# Altium PCB model_a.PcbDoc (part 2 of 2)
Units mm, origin at the board's own origin, x right, y up, seen from the top; angles counter-clockwise.
Board outline 65 x 56 mm, 6 copper layers (Top Layer, Ground 1, Supply, Layer 2, Ground 2, Bottom Layer), stack 1.597 mm thick; 97 components, 140 nets, 582 pads, 134 vias.
Unrouted connection lines stored in the file: 357.
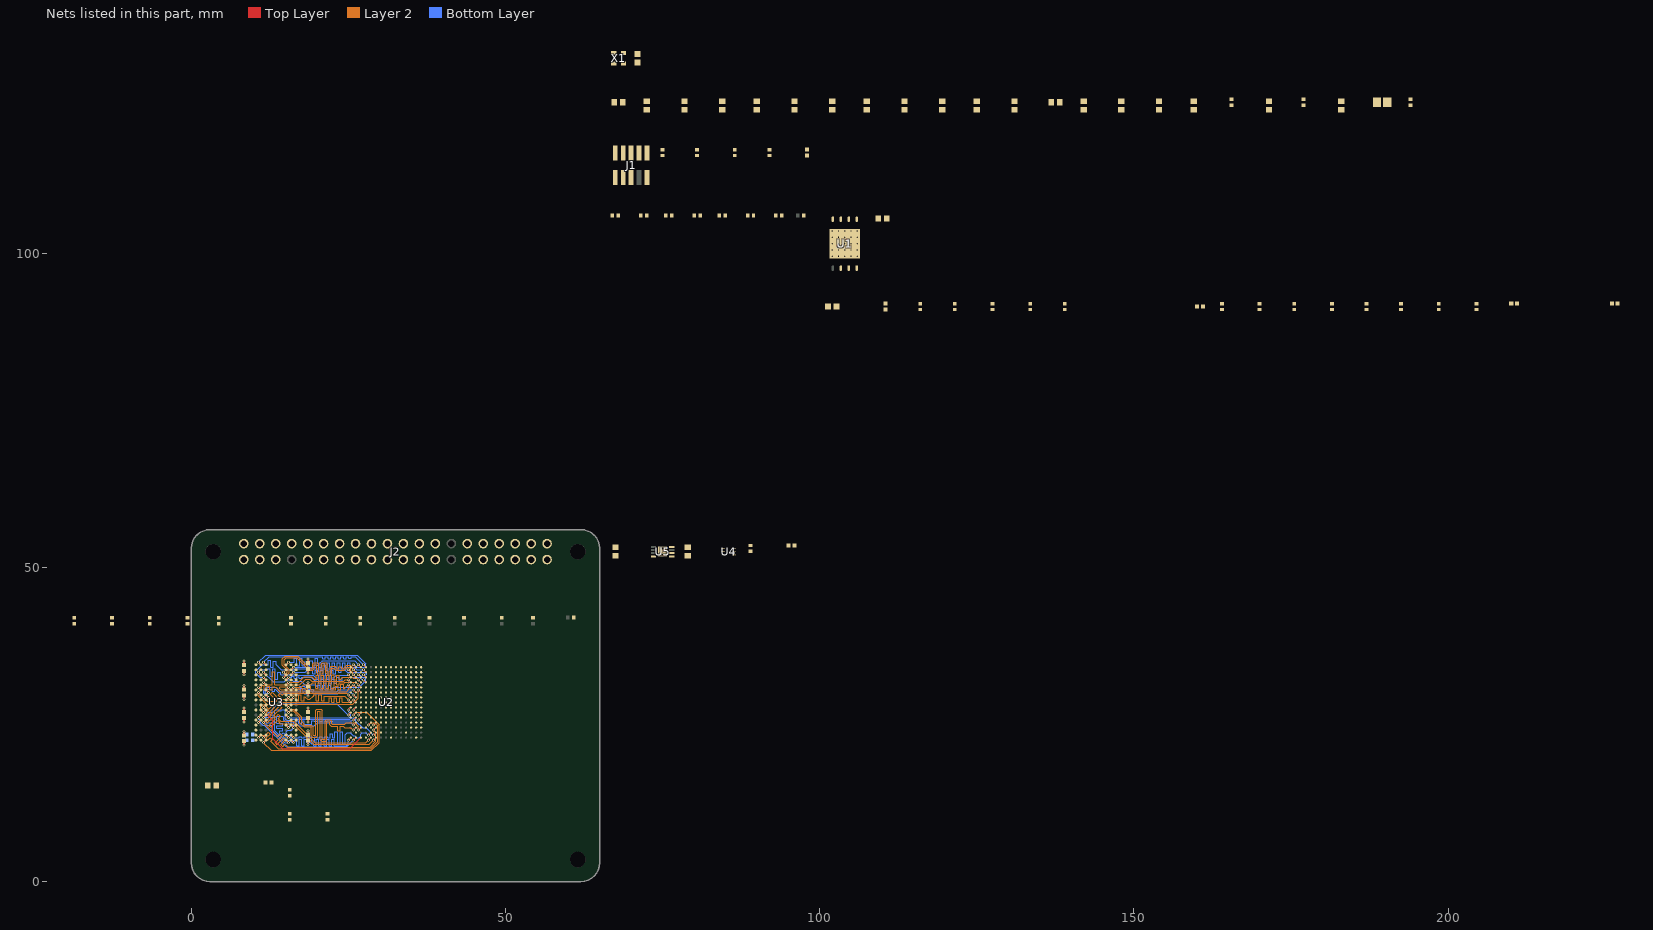
[diagram p3: the nets of this part, all layers, seen from the top]

## Via types
v1: diameter 0.46, hole 0.2, Top Layer to Bottom Layer, tented both sides, 107 vias
v2: diameter 0.5, hole 0.2, Top Layer to Bottom Layer, 25 vias
v3: diameter 0.6, hole 0.3, Top Layer to Bottom Layer, 2 vias

## Nets (pads, with @x,y where several pads share a name; then routed paths per layer and width w, separated by ;. In a path a pad name is that pad's centre, name@x,y a point inside that pad or via, vN(x,y) a via of type N, cw(c..) or ccw(c..) an arc to the next point about the centre after c; other vN are vias at no path point) (continued)
A6: R15.1 U2.P5 U3.R8 | length 27.1
  Top Layer w0.158: U3.R8@15.9,23.3 15.9,23.298 v1(16.3,22.897) v1(16.3,22.897) ; v1(28.2,23.3) U2.P5@28.6,23.7
  Bottom Layer w0.158: v1(16.3,22.897) 17.079,22.897 17.158,22.897 17.158,23.058 17.571,23.058 17.571,22.897 17.983,22.897 17.983,23.058 18.396,23.058 18.396,22.897 18.808,22.897 18.808,23.058 19.22,23.058 19.22,22.229 19.633,22.229 19.633,23.058 20.045,23.058 20.045,22.897 20.458,22.897 20.458,23.058 20.87,23.058 20.87,22.897 21.282,22.897 21.282,23.058 21.695,23.058 21.695,22.897 22.107,22.897 22.107,23.549 22.52,23.549 22.52,22.897 22.8,22.897 22.879,22.897 22.879,23.853 23.292,23.853 23.292,21.896 23.704,21.896 23.704,23.853 24.116,23.853 24.116,21.896 24.529,21.896 24.529,23.385 24.759,23.615 24.835,23.692 25.296,23.692 25.822,23.166 26.047,23.166 26.308,22.905 26.765,22.905 27,23.14 27,23.463 27.235,23.698 27.802,23.698 v1(28.2,23.3)
A7: R16.1 U2.M5 U3.R2 | length 28.5
  Top Layer w0.158: v1(10.7,22.9) U3.R2@11.1,23.3 ; v1(28.2,24.9) U2.M5@28.6,25.3
  Layer 2 w0.169: v1(10.7,22.9) 11.1,23.3 11.71,23.3 11.77,23.24 12.262,23.733 12.561,23.434 11.903,22.776 12.202,22.478 12.576,22.852 12.875,22.553 12.666,22.344 13,22.01 13.871,21.139 28.574,21.139 29.661,22.226 29.661,24.81 29.167,25.303 28.603,25.303 v1(28.2,24.9)
A8: R17.1 U2.P6 U3.T8 | length 27.1
  Top Layer w0.158: U3.T8@15.9,22.5 v1(16.3,22.1) ; v1(29,23.3) U2.P6@29.4,23.7
  Bottom Layer w0.158: v1(16.3,22.1) 16.246,22.154 16.009,22.154 15.664,22.499 14.851,22.499 13.333,24.017 13.333,27.207 13.426,27.3 13.917,27.3 13.917,27.161 14.33,27.161 14.33,27.3 14.789,27.3 14.907,27.3 15,27.207 15,25.856 15.2,25.656 15.744,25.656 15.94,25.853 19.403,25.853 19.405,25.855 25.267,25.855 25.511,26.098 25.965,26.098 26.202,25.861 26.202,25.535 27.27,24.467 27.833,24.467 v1(29,23.3)
A9: R18.1 U2.N4 U3.R3 | length 0.6
  Top Layer w0.158: v1(11.5,22.897) v1(11.5,22.897) 11.9,23.298 U3.R3@11.9,23.3
A10: R21.1 U2.J1 U3.L7 | length 12.3
  Top Layer w0.158: U3.L7@15.1,26.5 v1(15.5,26.1) ; v1(25,27.3) U2.J1@25.4,27.7
  Bottom Layer w0.158: v1(15.5,26.1) 19.301,26.1 19.302,26.102 25.165,26.102 25.398,26.335 25.398,26.665 25.054,27.009 25.054,27.246 v1(25,27.3)
A11: R23.1 U2.L2 U3.R7 | length 26.7
  Top Layer w0.158: U3.R7@15.1,23.3 15.1,23.298 v1(15.5,22.897) v1(15.5,22.897) ; v1(25.8,25.7) U2.L2@26.2,26.1
  Bottom Layer w0.158: v1(15.5,22.897) 15.167,22.897 15.055,22.897 14.929,22.77 14.637,23.062 14.933,23.358 14.641,23.649 14.346,23.354 14.199,23.5 14.12,23.579 14.12,23.992 14.531,23.992 14.531,24.404 13.58,24.404 13.58,24.817 14.531,24.817 14.531,25.229 13.58,25.229 13.58,25.641 13.6,25.641 13.6,26.022 13.6,26.304 14.607,26.304 14.7,26.211 14.7,25.7 15,25.4 15.079,25.4 15.079,25.409 15.492,25.409 15.492,25.145 15.904,25.145 15.904,25.468 16.316,25.468 16.316,25.145 16.729,25.145 16.729,25.605 17.141,25.605 17.141,25.134 17.554,25.134 17.554,25.605 17.966,25.605 17.966,25.002 19.203,25.002 19.203,25.605 19.616,25.605 19.616,25.532 20.028,25.532 20.028,25.607 20.44,25.607 20.44,25.545 20.853,25.545 20.853,25.607 21.265,25.607 21.265,25.545 21.678,25.545 21.678,25.607 22.09,25.607 22.09,25.545 22.502,25.545 22.502,25.607 22.8,25.607 25.556,25.607 25.591,25.642 25.742,25.642 v1(25.8,25.7)
A12: R25.1 U2.M2 U3.N7 | length 12
  Top Layer w0.158: U3.N7@15.1,24.9 v1(15.5,24.5) ; v1(25.8,24.9) U2.M2@26.2,25.3
  Bottom Layer w0.158: v1(15.5,24.5) 15.898,24.898 17.068,24.898 17.211,24.755 19.564,24.755 20.108,25.298 25.402,25.298 v1(25.8,24.9)
A13: R27.1 U2.K2 U3.T3 | length 28.5
  Top Layer w0.158: v1(11.5,22.1) U3.T3@11.9,22.5 ; v1(25.8,26.5) U2.K2@26.2,26.9
  Layer 2 w0.169: v1(11.5,22.1) 12.718,20.882 28.68,20.882 29.918,22.12 29.918,24.916 27.931,26.903 26.203,26.903 v1(25.8,26.5)
A14: R29.1 U2.K1 U3.T7 | length 27.1
  Top Layer w0.158: U3.T7@15.1,22.5 v1(15.5,22.1) ; v1(25,26.5) U2.K1@25.4,26.9
  Bottom Layer w0.158: v1(15.5,22.1) 14.9,22.1 12.9,24.1 12.9,24.817 12.9,24.896 11.936,24.896 11.936,25.309 13.086,25.309 13.086,25.721 11.898,25.721 11.898,26.134 13.086,26.134 13.086,26.546 12.249,26.546 12.249,26.958 12.9,26.958 12.9,27.4 13.8,28.3 23.2,28.3 v1(25,26.5)
A15: R32.1
AGND: C19.1 FB3.2 U2.G8 U2.H7
BA0: R24.1 U2.M6 U3.M2 | length 1.1
  Top Layer w0.158: v1(10.7,25.3) U3.M2@11.1,25.7 ; v1(29,24.9) U2.M6@29.4,25.3
BA1: R26.1 U2.R1 U3.N8 | length 26.7
  Top Layer w0.158: U3.N8@15.9,24.9 v1(16.3,24.5) ; v1(25,22.5) U2.R1@25.4,22.9
  Bottom Layer w0.158: v1(16.3,24.5) 15.901,24.101 15.335,24.101 15.102,23.868 15.102,23.538 15.34,23.3 15.66,23.3 15.898,23.062 15.898,22.736 16.135,22.499 16.459,22.499 16.6,22.499 16.759,22.34 16.759,21.649 17.171,21.649 17.171,22.65 17.584,22.65 17.584,21.649 17.996,21.649 17.996,22.65 18.408,22.65 18.408,22.198 18.821,22.198 18.821,22.2 18.9,22.2 19.072,22.028 19.072,21.934 19.484,21.934 19.484,21.649 19.897,21.649 19.897,22.65 20.309,22.65 20.309,21.649 20.722,21.649 20.722,22.65 21.134,22.65 21.134,21.649 21.546,21.649 21.546,22.65 21.959,22.65 21.959,21.649 22.371,21.649 22.371,22.65 22.784,22.65 22.784,21.649 23.119,21.649 24.64,21.649 25,22.01 v1(25,22.5)
BA2: R28.1 U2.N6 U3.M3 | length 28.5
  Top Layer w0.158: v1(11.5,25.3) U3.M3@11.9,25.7 ; v1(29,24.1) U2.N6@29.4,24.5
  Layer 2 w0.169: v1(11.5,25.3) 13.667,23.133 13.727,23.073 14.17,23.515 14.468,23.217 13.354,22.103 13.653,21.804 14.767,22.918 15.066,22.619 14.236,21.789 14.535,21.491 14.922,21.878 15.117,21.683 15.403,21.397 28.467,21.397 29.403,22.333 29.403,23.697 v1(29,24.1)
CAS: R36.1 U2.R5 U3.K3 | length 28.5
  Top Layer w0.158: v1(11.5,26.9) U3.K3@11.9,27.3 ; v1(28.2,22.5) U2.R5@28.6,22.9
  Layer 2 w0.169: v1(11.5,26.9) 11.097,27.303 11.097,27.867 11.333,28.103 11.671,28.103 12.276,27.498 12.336,27.438 12.88,27.982 13.179,27.683 12.53,27.034 12.829,26.736 14.075,27.982 14.374,27.683 13.127,26.437 13.426,26.138 13.88,26.592 14.179,26.293 13.83,25.944 14.276,25.498 16.325,25.498 19.729,22.094 27.794,22.094 v1(28.2,22.5)
CFGBVS: C1.2 C26.2 C27.2 C37.1 C38.1 C39.2 C40.1 J1.1 R1.2 R2.2 R41.2 R42.2 R43.2 U1.8 U2.A6 U2.D7 U2.F6 U4.5 U5.8 X1.1 X1.4
CK_N: R39.1 U2.N2 U3.K7 | length 28.5
  Top Layer w0.158: U3.K7@15.1,27.3 v1(15.5,26.9) ; v1(25.8,24.1) U2.N2@26.2,24.5
  Layer 2 w0.158: 24.2,24.7 24.4,24.5 25.2,24.5
  Layer 2 w0.175: v1(15.5,26.9) 15.749,27.149 16.2,27.149 17.3,26.049 17.3,25.273 17.975,24.598 18.1,24.598 19.007,24.598 19.11,24.495 19.11,23.17 19.287,22.993 19.966,22.993 20.143,23.17 20.143,27.138 20.572,27.138 20.572,22.537 20.749,22.36 21.428,22.36 21.605,22.537 21.605,25.412 22.034,25.412 22.034,24.979 22.314,24.7 22.8,24.7 22.888,24.7 22.888,24.738 23.317,24.738 23.317,23.976 23.746,23.976 23.746,24.7 24.2,24.7 ; 25.2,24.5 25.4,24.5 v1(25.8,24.1)
CK_P: R39.2 U2.N3 U3.J7 | length 28.5
  Top Layer w0.158: U3.J7@15.1,28.1 v1(15.5,27.7) ; v1(26.6,24.1) U2.N3@27,24.5
  Layer 2 w0.158: 24.7,25.3 25.7,25.3 25.702,25.298 25.965,25.298 26.063,25.2 26.1,25.2 26.6,24.7 v1(26.6,24.1)
  Layer 2 w0.175: v1(15.5,27.7) 15.749,27.451 16.325,27.451 17.602,26.174 17.602,25.398 18.1,24.9 19.132,24.9 19.412,24.621 19.412,23.295 19.841,23.295 19.841,27.263 20.018,27.44 20.697,27.44 20.874,27.263 20.874,22.662 21.303,22.662 21.303,25.537 21.48,25.714 22.159,25.714 22.336,25.537 22.336,25.105 22.439,25.002 22.8,25.002 24.402,25.002 24.7,25.3
CKE: R40.1 U2.L3 U3.K9 | length 0.6
  Top Layer w0.158: v1(26.6,25.7) U2.L3@27,26.1
CS: R38.1 U2.R2 U3.L2 | length 18.9
  Top Layer w0.158: v1(10.7,26.1) U3.L2@11.1,26.5 ; v1(25.8,22.5) U2.R2@26.2,22.9
  Bottom Layer w0.102: v1(10.7,26.1) 10.73,26.07 10.73,25.793 11.07,25.453 11.07,25.207 11.407,24.87 11.653,24.87 15.093,21.43 24.73,21.43 v1(25.8,22.5)
DGND: C1.1 C3.1 C4.1 C5.1 C6.1 C7.1 C8.1 C9.1 C10.1 C11.1 C12.1 C13.1 C14.1 C15.1 C16.1 C17.1 C18.1 C20.1 C21.1 C22.1 C23.1 C24.1 C25.1 C26.1 C27.1 C28.1 C29.1 C30.1 C31.1 C32.1 C33.1 C34.1 C35.1 C36.1 C37.2 C38.2 C39.1 C40.2 FB3.1 J1.3 J1.5 J1.9 J2.6 J2.9 J2.14 J2.20 J2.25 J2.30 J2.34 J2.39 R3.1 R4.1 R5.1 R6.1 R7.1 R8.1 R19.2 R22.1 R33.2 R35.1 U1.4 U1.9 U2.A1 U2.A11 U2.B8 U2.C5 U2.C15 U2.D2 U2.D12 U2.E5 U2.E7 U2.E8 U2.E9 U2.F8 U2.F10 U2.G3 U2.G5 U2.G13 U2.H6 U2.H10 U2.J5 U2.J9 U2.K4 U2.K7 U2.K10 U2.K14 U2.L1 U2.L5 U2.L11 U2.M8 U2.N5 U2.N15 U2.P2 U2.P12 U2.R9 U3.A9 U3.B1 U3.B3 U3.B9 U3.D1 U3.D8 U3.E1 U3.E2 U3.E8 U3.F9 U3.G1 U3.G8 U3.G9 U3.J2 U3.J8 U3.M1 U3.M9 U3.P1 U3.P9 U3.T1 U3.T9 U4.2 U4.4 U5.4 U5.9 X1.2 | length 5.1
  Top Layer w0.254: v1(8.4,21.7) C12.1@8.4,22.34 ; v1(8.4,25.4) C15.1@8.4,26.04 ; v1(8.4,29) C6.1@8.4,29.64 ; v1(8.4,32.9) C11.1@8.4,33.54 ; v1(18.6,21.8) C14.1@18.6,22.44 ; v1(18.6,25.4) C9.1@18.6,26.04 ; v1(18.6,29.5) C16.1@18.6,30.14 ; v1(18.6,33.2) C13.1@18.6,33.84
  other v2: 102,99.5 103,99.5 104,99.5 105,99.5 106,99.5 102,100.5 103,100.5 104,100.5 105,100.5 106,100.5 102,101.5 103,101.5 104,101.5 105,101.5 106,101.5 102,102.5 103,102.5 104,102.5 105,102.5 106,102.5 102,103.5 103,103.5 104,103.5 105,103.5 106,103.5
  other v3: 75,52 75,53
DM0: U2.D3 U3.E7 | length 19.9
  Top Layer w0.158: U3.E7@15.1,31.3 v1(15.5,31.7) ; v1(26.6,32.1) U2.D3@27,31.7
  Layer 2 w0.158: v1(15.5,31.7) 17.1,31.7 18,32.6 19.2,32.6 19.6,32.2 19.806,32.2 19.885,32.2 19.885,32.838 20.298,32.838 20.298,32.147 20.71,32.147 20.71,32.838 21.123,32.838 21.123,32.147 21.535,32.147 21.535,32.838 21.947,32.838 21.947,32.147 22.36,32.147 22.36,32.883 22.772,32.883 22.772,32.147 23.185,32.147 23.185,32.799 23.597,32.799 23.597,32.2 23.8,32.2 24.1,32.5 24.156,32.5 25.6,32.5 25.75,32.35 26.35,32.35 v1(26.6,32.1)
DM1: U2.B1 U3.D3 | length 21.9
  Top Layer w0.158: v1(11.5,32.5) U3.D3@11.9,32.1 ; v1(25,33.7) U2.B1@25.4,33.3
  Bottom Layer w0.158: v1(11.5,32.5) 10.937,32.5 10.302,33.135 10.302,33.465 11.335,34.498 12.184,34.498 12.22,34.498 12.263,34.498 12.263,35.238 12.675,35.238 12.675,34.123 13.088,34.123 13.088,35.067 13.5,35.067 13.5,34.498 14.25,33.748 14.296,33.702 16.465,33.702 16.608,33.845 24.773,33.845 24.918,33.7 v1(25,33.7)
DONE: R44.1 U2.M7
DQ0: U2.E1 U3.F7 | length 18.8
  Top Layer w0.158: U3.F7@15.1,30.5 v1(15.5,30.9) ; v1(25,31.3) U2.E1@25.4,30.9
  Layer 2 w0.169: v1(15.5,30.9) 15.444,30.956 15.3,30.956 15.256,31 14.199,31 14.1,30.901 14.1,30.7 14.303,30.497 16.7,30.497 16.888,30.497 16.888,30.648 17.31,30.648 17.31,30.497 17.733,30.497 17.733,30.776 18.155,30.776 18.155,30.497 18.578,30.497 18.578,31.048 19,31.048 19,30.497 19.423,30.497 19.507,30.497 22.9,30.497 22.984,30.497 22.984,31.043 23.407,31.043 23.407,30.497 23.829,30.497 23.829,31.4 24.252,31.4 24.252,30.65 24.351,30.65 24.512,30.812 v1(25,31.3)
DQ1: U2.D1 U3.E3 | length 19.5
  Top Layer w0.158: v1(11.5,31.7) U3.E3@11.9,31.3 ; v1(25,32.1) U2.D1@25.4,31.7
  Layer 2 w0.158: v1(11.5,31.7) 11.9,31.3 11.991,31.3 12.895,31.3 12.895,33.382 13.307,33.382 13.307,31.3 14.3,31.3 17.3,31.3 18.2,32.2 18.9,32.2 19.2,31.9 24.3,31.9 24.5,32.1 v1(25,32.1)
DQ2: U2.E2 U3.F2 | length 19.9
  Top Layer w0.158: v1(10.7,30.9) U3.F2@11.1,30.5 ; v1(25.8,31.3) U2.E2@26.2,30.9
  Layer 2 w0.169: v1(10.7,30.9) 11.134,30.9 11.219,30.9 11.219,31.202 11.641,31.202 11.641,30.434 12.064,30.434 12.064,31.048 12.486,31.048 12.486,30.484 12.909,30.484 12.909,30.97 13.331,30.97 13.331,30.9 13.423,30.9 14.083,30.239 24.739,30.239 25.03,30.53 25.089,30.589 25.026,30.653 25.325,30.951 25.388,30.888 25.5,31 v1(25.8,31.3)
DQ3: U2.E3 U3.F8 | length 19.9
  Top Layer w0.158: U3.F8@15.9,30.5 v1(16.3,30.9) ; v1(26.6,31.3) U2.E3@27,30.9
  Layer 2 w0.158: v1(16.3,30.9) 17.5,30.9 17.9,31.3 19,31.3 19.353,31.653 19.844,31.653 19.844,30.749 20.257,30.749 20.257,31.653 20.669,31.653 20.669,30.749 21.081,30.749 21.081,31.653 21.494,31.653 21.494,30.749 21.906,30.749 21.906,31.653 22.319,31.653 22.319,30.749 22.731,30.749 22.731,31.653 23.143,31.653 23.143,31.295 23.556,31.295 23.556,31.653 24,31.653 24.402,31.653 24.45,31.7 26.2,31.7 v1(26.6,31.3)
DQ4: U2.F3 U3.G2 | length 19.9
  Top Layer w0.158: v1(10.7,30.1) U3.G2@11.1,29.7 ; v1(26.6,30.5) U2.F3@27,30.1
  Layer 2 w0.169: v1(10.7,30.1) 10.7,29.53 11.99,28.239 25.71,28.239 26.6,29.13 v1(26.6,30.5)
DQ5: U2.G1 U3.H3 | length 19.8
  Top Layer w0.158: v1(11.5,29.3) U3.H3@11.9,28.9 ; v1(25,29.7) U2.G1@25.4,29.3
  Layer 2 w0.169: v1(11.5,29.3) 12.1,28.7 13.539,28.7 13.599,28.76 12.564,29.794 12.863,30.093 14.046,28.91 14.345,29.209 13.87,29.683 14.169,29.982 14.495,29.656 14.8,29.961 24.74,29.961 v1(25,29.7)
DQ6: U2.H1 U3.H7 | length 18.8
  Top Layer w0.158: U3.H7@15.1,28.9 v1(15.5,29.3) ; v1(25,28.9) U2.H1@25.4,28.5
  Layer 2 w0.169: v1(15.5,29.3) 15.903,29.703 16.2,29.703 16.707,29.703 16.707,28.754 17.129,28.754 17.129,29.703 17.552,29.703 17.552,28.754 17.974,28.754 17.974,29.439 18.073,29.439 18.187,29.326 18.512,29 18.9,29 19.4,29.5 19.484,29.5 19.484,29.703 19.907,29.703 19.907,28.754 20.329,28.754 20.329,29.703 20.752,29.703 20.752,28.754 21.174,28.754 21.174,29.5 21.648,29.5 24.4,29.5 v1(25,28.9)
DQ7: U2.H2 U3.H8 | length 19.7
  Top Layer w0.158: U3.H8@15.9,28.9 v1(16.3,29.3) ; v1(25.8,28.9) U2.H2@26.2,28.5
  Layer 2 w0.169: v1(16.3,29.3) 16.018,29.018 15.788,29.018 15.667,28.897 15.153,28.897 15.032,29.018 14.518,29.018 14.4,28.9 14.4,28.6 14.503,28.497 21.1,28.497 21.51,28.497 21.932,28.497 21.932,29.243 22.355,29.243 22.355,28.497 22.778,28.497 22.778,29.243 23.2,29.243 23.2,28.497 23.623,28.497 23.623,29.243 24.045,29.243 24.045,28.497 24.468,28.497 24.89,28.497 25.313,28.497 25.397,28.497 v1(25.8,28.9)
DQ8: U2.D4 U3.D7 | length 21.9
  Top Layer w0.158: U3.D7@15.1,32.1 v1(15.5,32.5) ; v1(27.4,32.1) U2.D4@27.8,31.7
  Bottom Layer w0.158: v1(15.5,32.5) 15.9,32.5 15.979,32.5 15.979,32.651 16.392,32.651 16.392,32.345 16.804,32.345 16.804,32.555 17.216,32.555 17.216,32.345 17.629,32.345 17.629,32.502 18.041,32.502 18.041,32.5 18.75,32.5 19.1,32.5 19.8,31.8 19.879,31.8 19.879,32.153 20.292,32.153 20.292,31.447 20.704,31.447 20.704,32.153 21.116,32.153 21.116,31.447 21.529,31.447 21.529,32.153 21.941,32.153 21.941,31.447 22.354,31.447 22.354,32.153 22.766,32.153 22.766,31.528 23.178,31.528 23.178,32.531 23.591,32.531 23.591,31.949 24.003,31.949 24.003,32.5 24.209,32.5 26.763,32.5 27.109,32.154 27.346,32.154 v1(27.4,32.1)
DQ9: U2.A2 U3.A2 | length 21.9
  Top Layer w0.158: v1(10.7,34.9) U3.A2@11.1,34.5 ; v1(25.8,34.5) U2.A2@26.2,34.1
  Bottom Layer w0.158: v1(10.7,34.9) 11.845,36.045 26.418,36.045 27.798,34.665 27.798,34.335 27.565,34.102 26.39,34.102 26.049,34.442 25.858,34.442 v1(25.8,34.5)
DQ10: U2.C4 U3.C8 | length 21.8
  Top Layer w0.158: U3.C8@15.9,32.9 v1(16.3,33.3) ; v1(27.4,32.9) U2.C4@27.8,32.5
  Bottom Layer w0.158: v1(16.3,33.3) 18.137,33.3 18.435,33.598 18.835,33.598 18.914,33.598 19.327,33.598 19.327,33.049 19.739,33.049 19.739,33.598 20.151,33.598 20.151,32.717 20.564,32.717 20.564,33.598 20.976,33.598 20.976,32.717 21.389,32.717 21.389,33.598 21.801,33.598 21.801,32.717 22.213,32.717 22.213,33.598 22.626,33.598 22.626,33.041 23.038,33.041 23.038,33.598 23.451,33.598 23.451,33.304 23.863,33.304 23.863,33.598 24.539,33.598 24.8,33.337 24.837,33.3 27.7,33.3 27.8,33.3 27.9,33.2 27.9,33 27.8,32.9 v1(27.4,32.9)
DQ11: U2.C1 U3.C2 | length 21.9
  Top Layer w0.158: v1(10.7,33.3) U3.C2@11.1,32.9 ; v1(25,32.9) U2.C1@25.4,32.5
  Bottom Layer w0.158: v1(10.7,33.3) 11.098,33.698 12.084,33.698 12.163,33.698 12.163,33.897 12.575,33.897 12.575,32.661 12.988,32.661 12.988,33.873 13.4,33.873 13.4,32.181 13.812,32.181 13.812,33.297 14.225,33.297 14.225,32.898 15.385,32.898 16.906,32.898 17.002,32.802 19.4,32.802 19.802,32.4 22.698,32.4 23.1,32.802 24.82,32.802 24.918,32.9 v1(25,32.9)
DQ12: U2.B4 U3.B8 | length 21.8
  Top Layer w0.158: U3.B8@15.9,33.7 v1(16.3,34.1) ; v1(27.4,33.7) U2.B4@27.8,33.3
  Bottom Layer w0.158: v1(16.3,34.1) 19.899,34.1 19.978,34.1 19.978,34.432 20.39,34.432 20.39,34.093 20.803,34.093 20.803,34.724 21.215,34.724 21.215,34.093 21.628,34.093 21.628,34.853 22.04,34.853 22.04,34.093 22.452,34.093 22.452,34.853 22.865,34.853 22.865,34.093 23.277,34.093 23.277,34.853 23.69,34.853 23.69,34.093 24.102,34.093 24.102,34.853 24.514,34.853 24.514,34.098 24.927,34.098 24.927,34.82 25.339,34.82 25.339,34.1 25.922,34.1 25.963,34.1 26.363,33.7 v1(27.4,33.7)
DQ13: U2.A4 U3.A3 | length 21.8
  Top Layer w0.158: v1(11.5,34.9) U3.A3@11.9,34.5 ; v1(27.4,34.5) U2.A4@27.8,34.1
  Bottom Layer w0.158: v1(11.5,34.9) 12.398,35.798 20.454,35.798 20.533,35.798 20.946,35.798 20.946,35.468 21.358,35.468 21.358,35.798 21.771,35.798 21.771,35.468 22.183,35.468 22.183,35.798 22.595,35.798 22.595,35.468 23.008,35.468 23.008,35.798 23.42,35.798 23.42,35.468 23.833,35.468 23.833,35.798 24.245,35.798 24.245,35.468 24.657,35.468 24.657,35.798 25.07,35.798 25.07,35.494 25.482,35.494 25.482,35.798 26.102,35.798 26.265,35.635 v1(27.4,34.5)
DQ14: U2.C3 U3.C3 | length 24.9
  Top Layer w0.158: v1(11.5,33.3) U3.C3@11.9,32.9 ; v1(26.6,32.9) U2.C3@27,32.5
  Bottom Layer w0.158: v1(11.5,33.3) 12.94,31.86 ; 13.015,31.785 14.785,31.785 15.1,32.1 16,32.1 16.2,31.9 17.5,31.9 18.1,31.3 19.705,31.3 20.046,30.958 20.103,30.902 20.126,30.902 20.126,31.2 20.538,31.2 20.538,30.501 20.95,30.501 20.95,31.2 21.363,31.2 21.363,30.501 21.775,30.501 21.775,31.2 22.188,31.2 22.188,30.554 22.6,30.554 22.6,30.902 23.72,30.902 26.765,30.902 27.798,31.935 27.798,32.265 27.561,32.502 27.235,32.502 26.891,32.846 26.654,32.846 v1(26.6,32.9)
DQ15: U2.A3 U3.A7 | length 21.8
  Top Layer w0.158: U3.A7@15.1,34.5 v1(15.5,34.9) ; v1(26.6,34.5) U2.A3@27,34.1
  Bottom Layer w0.158: v1(15.5,34.9) 16.338,34.9 16.417,34.9 16.417,35.551 16.829,35.551 16.829,34.365 17.242,34.365 17.242,35.551 17.654,35.551 17.654,34.365 18.067,34.365 18.067,35.002 18.479,35.002 18.479,34.365 18.891,34.365 18.891,35.128 19.304,35.128 19.304,34.365 19.716,34.365 19.716,35.551 20.129,35.551 20.129,34.68 20.541,34.68 20.541,34.9 20.629,34.9 20.82,35.091 20.829,35.1 26,35.1 v1(26.6,34.5)
DQS0_N: U2.F2 U3.G3 | length 19.6
  Top Layer w0.158: U3.G3@11.9,29.7 11.903,29.7 12.297,29.306 v1(12.3,29.306) ; v1(25.8,30.5) U2.F2@26.2,30.1
  Bottom Layer w0.158: v1(12.3,29.306) 12.046,29.56 11.882,29.56 11.515,29.928 11.515,30.418 11.982,30.885 13.518,30.885 14.102,30.302 14.204,30.2 16.9,30.2 17.063,30.2 17.156,30.293 17.156,30.9 17.323,31.067 17.972,31.067 18.139,30.9 18.139,30.183 18.551,30.183 18.551,30.445 18.718,30.613 19.367,30.613 19.534,30.445 19.534,30.293 19.627,30.2 23.2,30.2 23.485,30.485 25.785,30.485 v1(25.8,30.5)
DQS0_P: U2.G2 U3.F3 | length 19.6
  Top Layer w0.158: U3.F3@11.9,30.5 v1(12.3,30.1) ; v1(25.8,29.7) U2.G2@26.2,29.3
  Bottom Layer w0.158: v1(12.3,30.1) 12.089,29.889 11.957,29.889 11.8,30.046 11.8,30.3 12.1,30.6 12.4,30.6 12.479,30.6 12.479,30.638 12.892,30.638 12.892,30.25 13.304,30.25 13.304,30.6 13.4,30.6 14.085,29.915 16.9,29.915 17.181,29.915 17.441,30.175 17.441,30.781 17.853,30.781 17.853,30.065 18.021,29.898 18.669,29.898 18.837,30.065 18.837,30.327 19.249,30.327 19.249,30.175 19.509,29.915 23.2,29.915 23.318,29.915 23.604,30.2 25.3,30.2 v1@25.8,29.7
DQS1_N: U2.B2 U3.B7 | length 23.3
  Top Layer w0.158: v1(14.7,33.3) U3.B7@15.1,33.7 ; v1(25.8,33.7) U2.B2@26.2,33.3
  Layer 2 w0.158: v1(14.7,33.3) 14.913,33.087 15.044,33.087 15.3,33.343 15.3,33.6 14.7,34.2 14.515,34.385 14.515,35.418 14.982,35.885 16.918,35.885 18.102,34.702 18.198,34.605 18.904,33.9 19.053,33.9 19.216,33.9 19.308,33.993 19.308,34.615 19.475,34.782 20.124,34.782 20.291,34.615 20.291,33.371 20.704,33.371 20.704,34.615 20.871,34.782 21.52,34.782 21.687,34.615 21.687,33.371 22.099,33.371 22.099,34.055 22.267,34.222 22.915,34.222 23.083,34.055 23.083,33.993 23.175,33.9 23.44,33.9 23.519,33.9 23.519,34.144 23.931,34.144 23.931,33.9 24.233,33.9 24.717,34.383 25.283,34.383 25.684,33.983 25.684,33.898 25.8,33.782 v1(25.8,33.7)
DQS1_P: U2.C2 U3.C7 | length 23.3
  Top Layer w0.158: v1(14.7,32.5) U3.C7@15.1,32.9 ; v1(25.8,32.9) U2.C2@26.2,32.5
  Layer 2 w0.158: v1(14.7,32.5) 14.957,32.757 15.118,32.757 15.585,33.224 15.585,33.718 14.8,34.504 14.8,35.3 15.1,35.6 16.8,35.6 18.785,33.615 19.053,33.615 19.334,33.615 19.594,33.875 19.594,34.496 20.006,34.496 20.006,33.252 20.173,33.085 20.822,33.085 20.989,33.252 20.989,34.496 21.402,34.496 21.402,33.252 21.569,33.085 22.218,33.085 22.385,33.252 22.385,33.937 22.797,33.937 22.797,33.875 23.057,33.615 23.44,33.615 24.352,33.615 24.835,34.098 25.165,34.098 25.398,33.865 25.398,33.539 25.742,33.195 25.742,32.958 v1(25.8,32.9)
DRST: R33.1 U2.L4 U3.T2
EMMC_CLK: U2.B7
EMMC_CMD: U2.B10
EMMC_D0: U2.D6
EMMC_D1: U2.C6
EMMC_D2: U2.B9
EMMC_D3: U2.D10
GPIO0: D1.2 U2.G11
GPIO1: J2.11 U2.H12
GPIO2: J2.12 U2.G12
GPIO3: J2.13 U2.H13
GPIO4: J2.15 U2.G14
GPIO5: J2.16 U2.H14
GPIO6: J2.18 U2.J15
GPIO7: J2.19 U2.K15
GPIO8: J2.21 U2.J13
GPIO9: J2.22 U2.J14
GPIO10: J2.23 U2.H11
GPIO11: J2.24 U2.J11
GPIO12: J2.26 U2.N13
GPIO13: J2.29 U2.N14
GPIO14: J2.31 U2.L15
GPIO15: J2.32 U2.M15
GPIO16: J2.33 U2.L14
GPIO17: J2.35 U2.M14
GPIO18: J2.36 U2.K13
GPIO19: J2.37 U2.L13
GPIO20: J2.38 U2.K11
GPIO21: J2.40 U2.K12
I2C_SCL: J2.3 U2.B12 U4.1 U5.6
I2C_SDA: J2.5 U2.D13 U4.6 U5.5
INIT_B: R43.1 U2.D5
IO_L1_N: U2.E13
IO_L1_P: U2.F12
IO_L2_N: U2.E12
IO_L2_P: U2.E11
IO_L3_N: U2.F14
IO_L3_P: U2.F13
IO_L5_N: U2.F15
IO_L5_P: U2.G15
JTAG_TCK: J1.4 U2.G9
JTAG_TDI: J1.8 U2.L7
JTAG_TDO: J1.6 U2.L8
JTAG_TMS: J1.2 U2.L9
M5: R4.2 U2.D9
M6: R3.2 U2.B6
NetC17_2: C17.2 C18.2 FB1.1 U2.F5
NetD1_A: D1.1 R45.1
NetJ1_10: J1.10 R41.1 U2.B11
NetR20_2: R20.2 U2.H3
NetR22_2: R22.2 U2.J3
NetU2_C7: U2.C7 X1.3
NetU2_C9: U2.C9
NetU2_G7: U2.G7
NetU2_H8: U2.H8
ODT: R31.1 U2.K3 U3.K1 | length 0.6
  Top Layer w0.158: v1(26.6,26.5) U2.K3@27,26.9
PROGRAM_B: R42.1 U2.K6
QSPI_DIO0/M0: R8.2 U1.5 U2.A8
QSPI_DIO1/M1: R7.2 U1.2 U2.A7
QSPI_DIO2/M2: R6.2 U1.3 U2.C8
QSPI_DIO3/M3: R1.1 U1.7 U2.A9
QSPI_SCK/M4: R5.2 U1.6 U2.A10
RAS: R37.1 U2.R6 U3.J3 | length 28.1
  Top Layer w0.158: v1(11.5,27.7) U3.J3@11.9,28.1 ; v1(29,22.5) U2.R6@29.4,22.9
  Layer 2 w0.169: v1(11.5,27.7) 11.8,27.4 11.86,27.34 11.965,27.445 12.263,27.147 11.903,26.786 12.202,26.488 12.457,26.743 12.756,26.444 11.841,25.529 12.14,25.23 13.055,26.145 13.353,25.847 12.335,24.829 12.634,24.53 13.757,25.653 14.056,25.354 13.951,25.249 14.098,25.102 16.268,25.102 19.534,21.836 28.336,21.836 v1(29,22.5)
RX_CLK: U2.D15
RX_CTL: U2.D14
RX_DAT0: U2.A14
RX_DAT1: U2.B14
RX_DAT2: U2.C14
RX_DAT3: U2.A13
TX_CLK: U2.A15
TX_CTL: U2.C11
TX_DAT0: U2.D11
TX_DAT1: U2.B15
TX_DAT2: U2.C12
TX_DAT3: U2.E15
UART1_RX: J2.10 U2.C13
UART1_TX: J2.8 U2.A12
VANA_1V8D: C19.2 FB2.2 U2.F7
VDDR_1V35D: C2.1 C5.2 C6.2 C7.2 C8.2 C9.2 C10.2 C11.2 C12.2 C13.2 C14.2 C15.2 C16.2 R20.1 R30.2 U2.B3 U2.E4 U2.F1 U2.J2 U2.M3 U2.R4 U3.A1 U3.A8 U3.B2 U3.C1 U3.C9 U3.D2 U3.D9 U3.E9 U3.F1 U3.G7 U3.H2 U3.H9 U3.K2 U3.K8 U3.N1 U3.N9 U3.R1 U3.R9 | length 5.7
  Top Layer w0.158: v1(25.8,27.3) U2.J2@26.2,27.7
  Top Layer w0.254: C12.2@8.4,23.26 v1(8.4,23.9) ; C15.2@8.4,26.96 v1(8.4,27.6) ; C6.2@8.4,30.56 v1(8.4,31.2) ; C11.2@8.4,34.46 v1(8.4,35.1) ; C14.2@18.6,23.36 v1(18.6,24) ; C9.2@18.6,26.96 v1(18.6,27.609) ; C16.2@18.6,31.06 v1(18.6,31.7) ; C13.2@18.6,34.76 v1(18.6,35.4)
VIN_5V0: J2.2 J2.4
VINT_1V0D: U2.E10 U2.F9 U2.G6 U2.G10 U2.H5 U2.J10 U2.K5 U2.L10
VIO1_3V3D: C28.2 C29.2 U2.B13 U2.C10 U2.E14
VSYS_1V8D: C20.2 C21.2 C22.2 C23.2 C24.2 C25.2 C30.2 C31.2 C32.2 FB1.2 FB2.1 R44.2 U2.E6 U2.F11 U2.H9 U2.H15 U2.J6 U2.J8 U2.K8 U2.K9 U2.L6
VSYS_3V3D: C33.2 C34.2 C35.2 C36.2 J2.1 J2.17 R45.2 U2.G4 U2.H4 U2.J4 U2.J12 U2.M13 U2.N10 U2.P7 U2.R14
VTT_0V65D: R9.2 R10.2 R11.2 R12.2 R13.2 R14.2 R15.2 R16.2 R17.2 R18.2 R21.2 R23.2 R24.2 R25.2 R26.2 R27.2 R28.2 R29.2 R31.2 R32.2 R34.2 R36.2 R37.2 R38.2 R40.2
VTT_REF: C2.2 C3.2 C4.2 R30.1 R35.2 U2.F4 U3.H1 U3.M8
WE: R34.1 U2.R3 U3.L3 | length 20.3
  Top Layer w0.158: v1(11.5,26.1) U3.L3@11.9,26.5 11.96,26.44 12.16,26.44 13,25.6 13,22.7 14.6,21.1 25.203,21.1 26.6,22.497 26.6,22.498 27,22.898 U2.R3@27,22.9
ZQ: R19.1 U3.L8
pads on no net: J1.7 J2.27 J2.28 U2.D8 U2.J7 U2.L12 U2.M9 U2.M10 U2.M11 U2.M12 U2.N7 U2.N8 U2.N9 U2.N11 U2.N12 U2.P8 U2.P9 U2.P10 U2.P11 U2.P13 U2.P14 U2.P15 U2.R7 U2.R8 U2.R10 U2.R11 U2.R12 U2.R13 U2.R15 U3.J1 U3.J9 U3.L1 U3.L9 U3.M7 U5.1 U5.2 U5.3 U5.7